# Altium PCB COMECA-PCBv1.PcbDoc
Units mm, origin at the board's own origin, x right, y up, seen from the top; angles counter-clockwise.
Board outline 156.72 x 161.29 mm, 2 copper layers (Top Layer, Bottom Layer); 89 components, 83 nets, 409 pads, 26 vias.
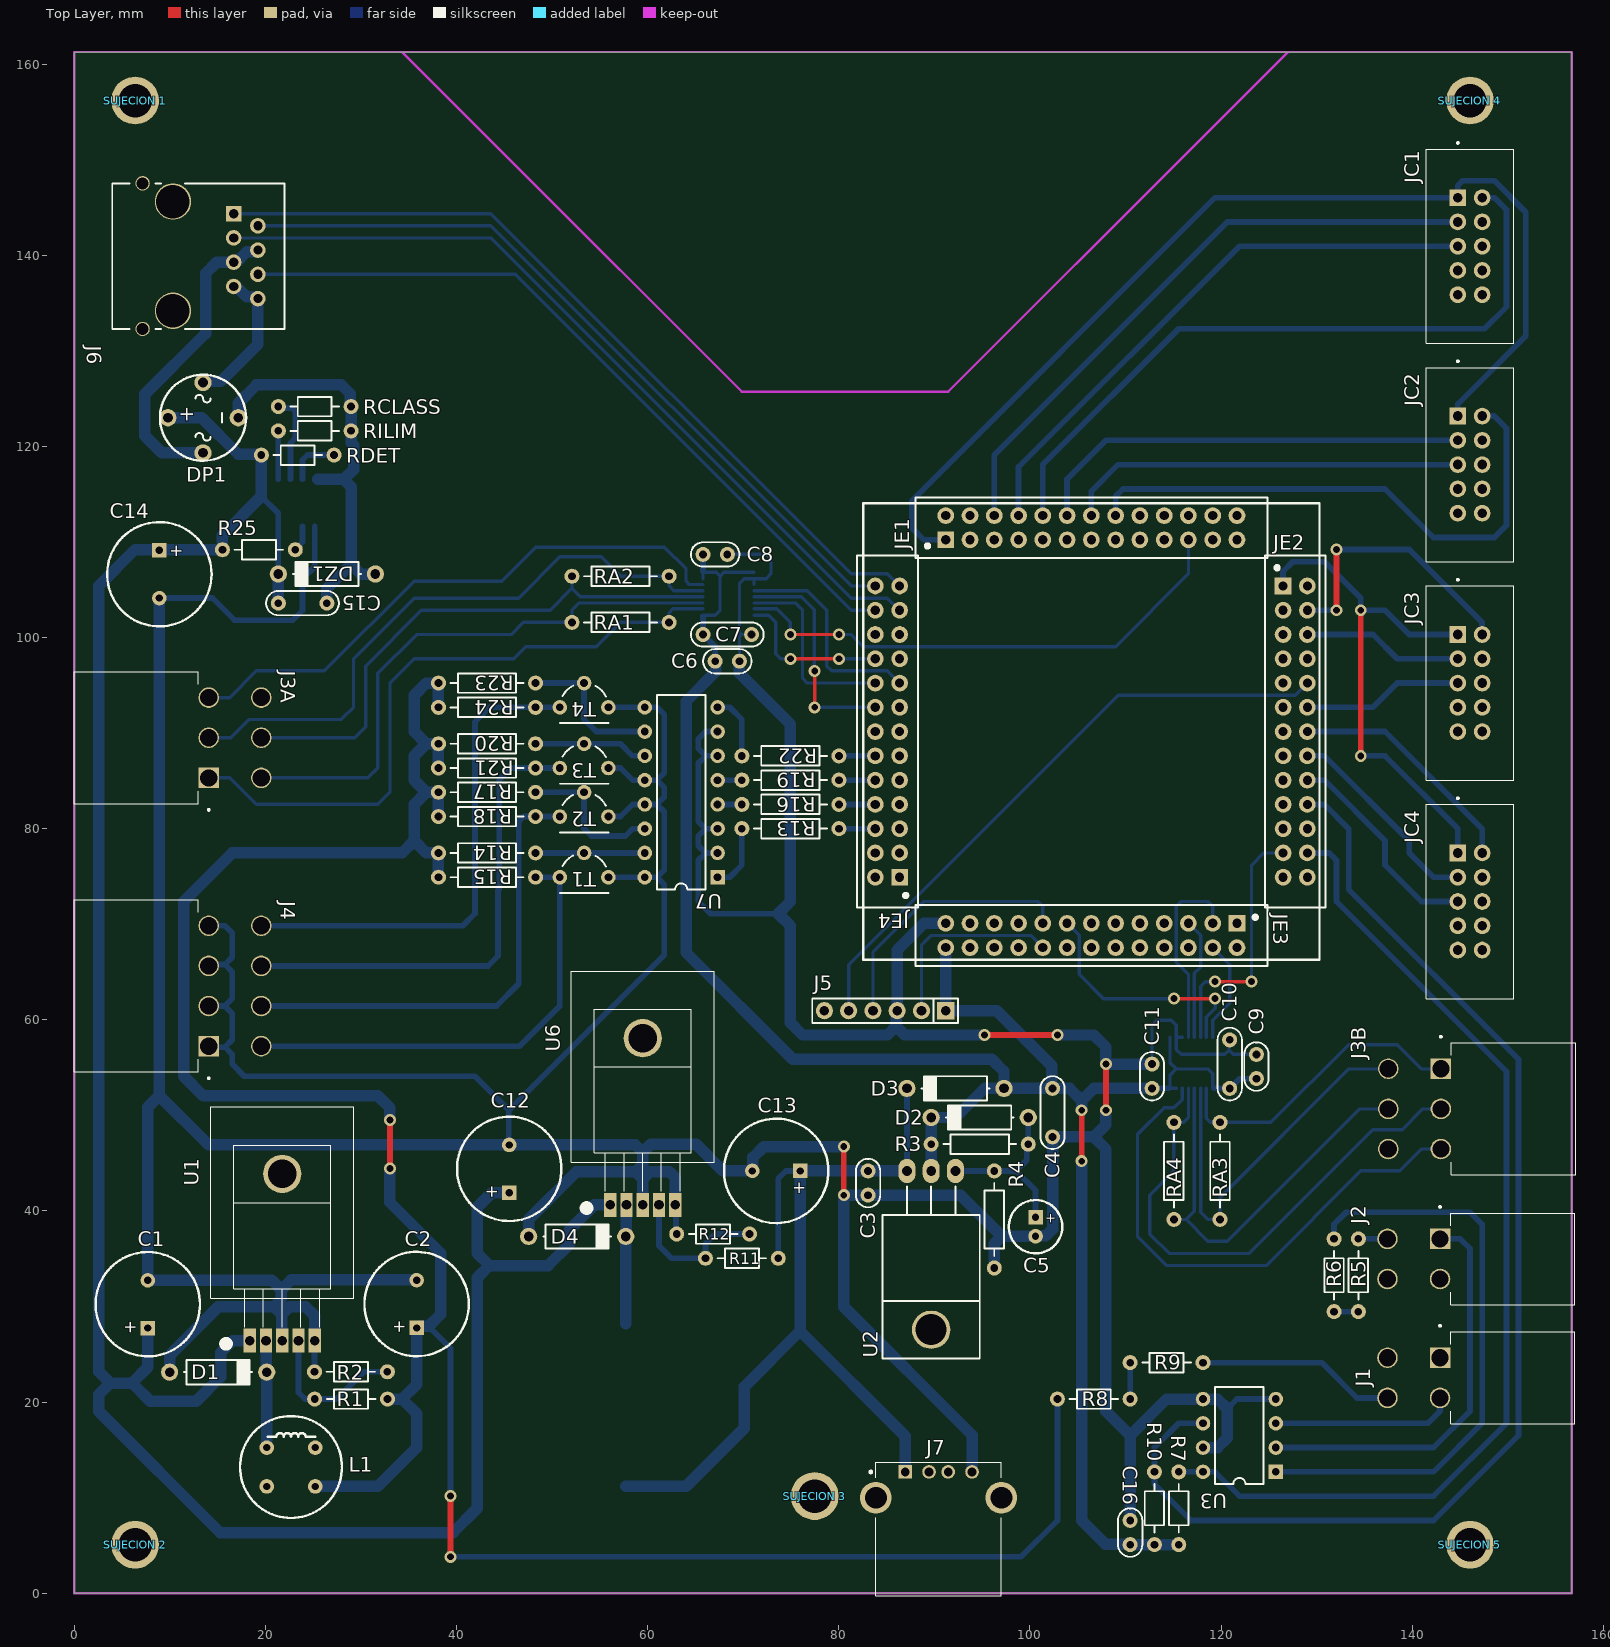
[diagram p0: Top Layer view]
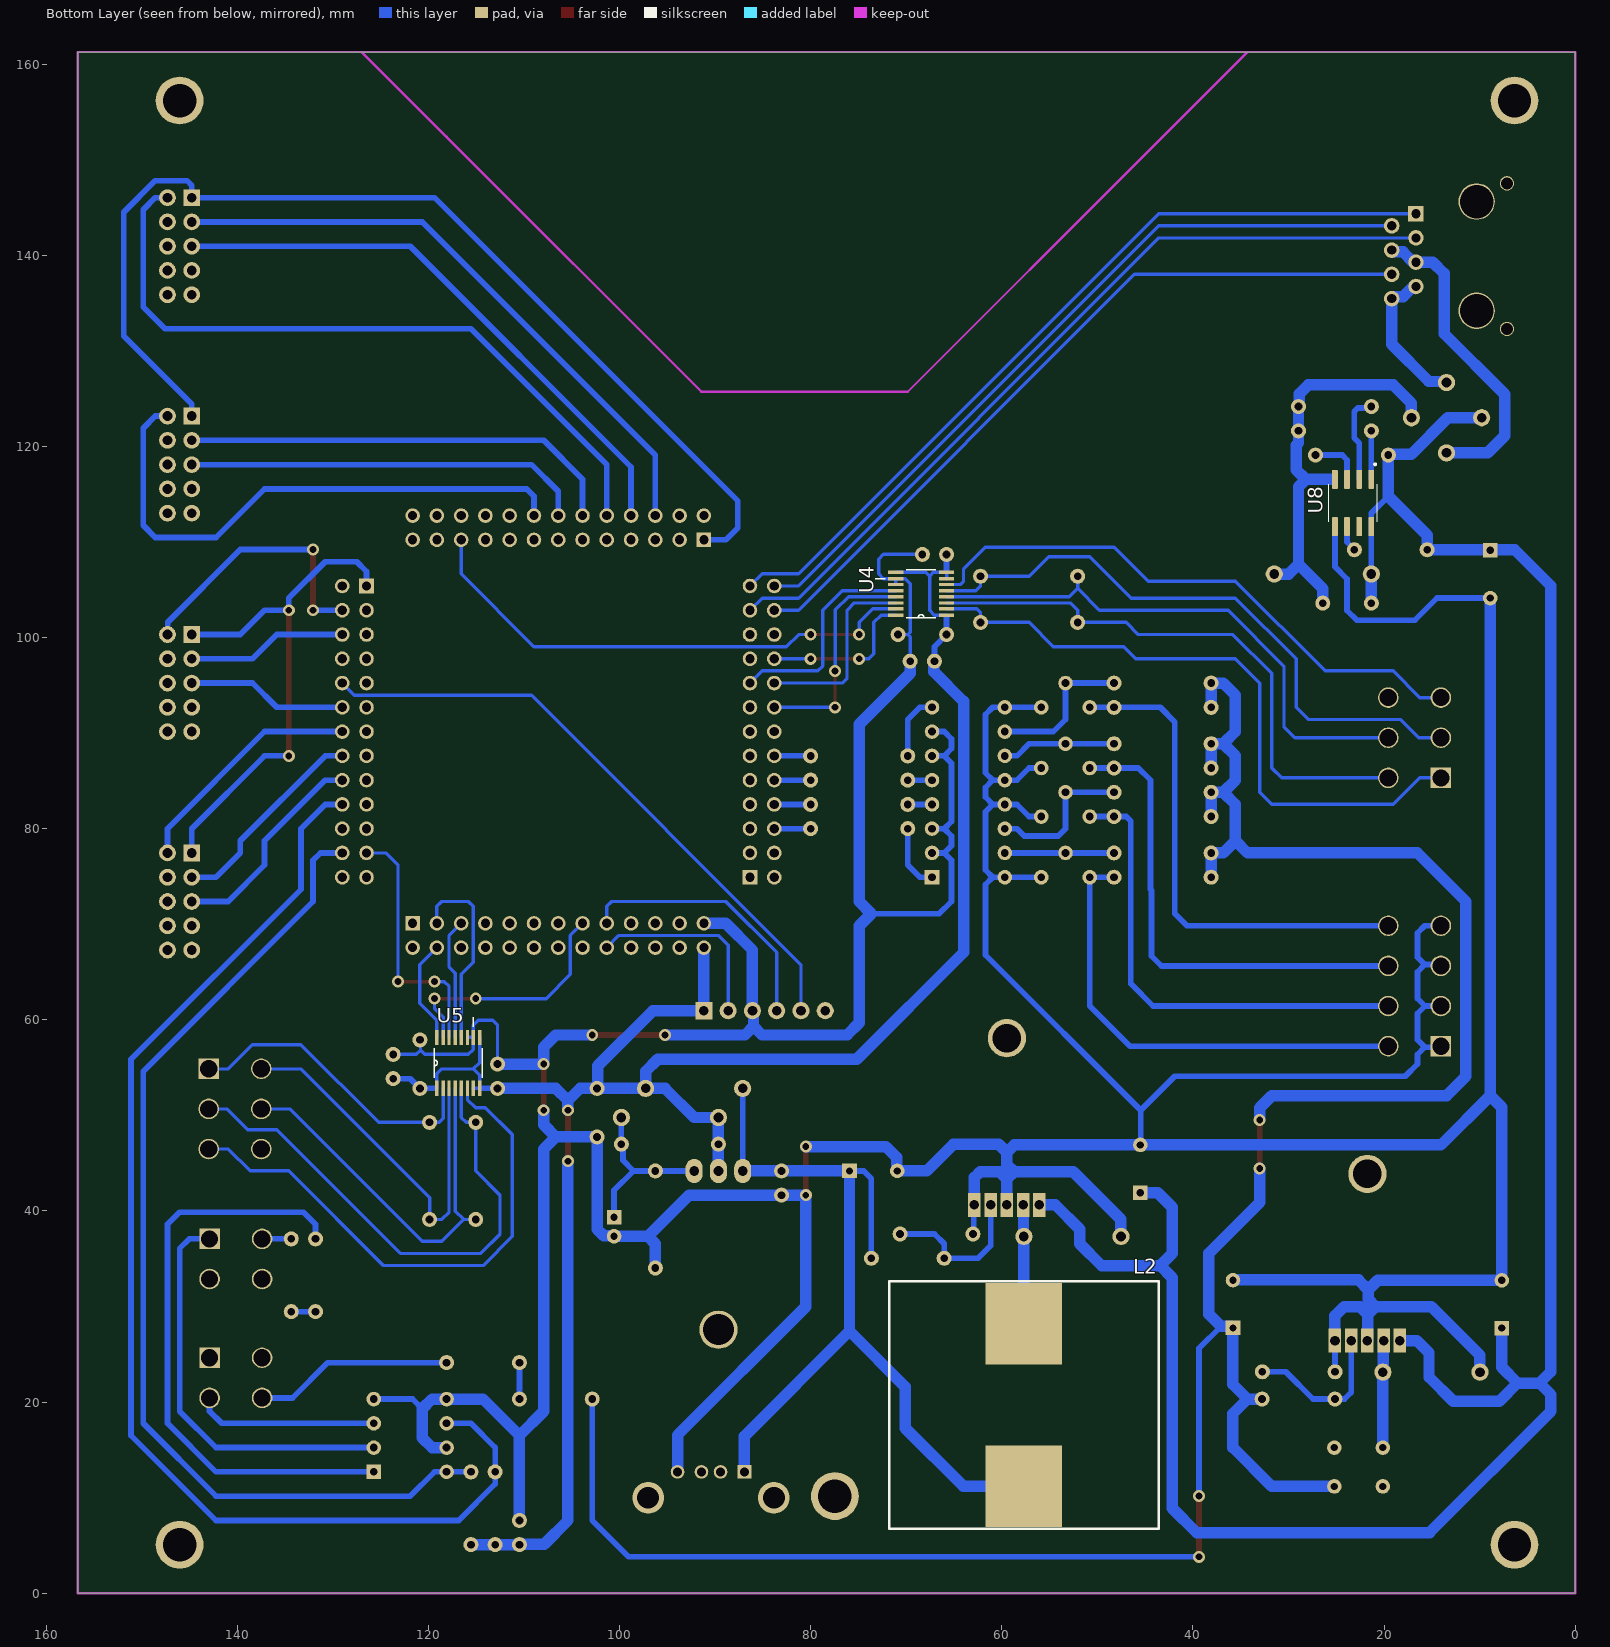
[diagram p1: Bottom Layer view, seen from below]

## Layer stack, top to bottom
Top Solder: solder mask 0.0102, Solder Resist, Dk 3.5
Top Layer: signal copper 0.0356
Dielectric 1: dielectric 0.32, FR-4, Dk 4.8
Bottom Layer: signal copper 0.0356
Bottom Solder: solder mask 0.0102, Solder Resist, Dk 3.5

## Board outline
0,0 156.718,0 156.718,161.29 0,161.29

## Design rules (kind name [scope] priority, off if disabled: settings)
Clearance [All] p1: gap=0.254 ignorepadtopadclearanceinfootprint=TRUE
ComponentClearance [All] p1: gap=0.22 collisioncheckmode=3 verticalgap=0.254 showdistances=FALSE
PolygonConnect [All] p1: connectstyle=Relief reliefconductorwidth=0.254 reliefentries=4 polygonreliefangle="90 Angle" airgapwidth=0.254
RoutingVias [All] p1: holewidth=0.711 width=1.25 viastyle="Through Hole" minholewidth=0.711 minwidth=1.25 maxholewidth=0.711 maxwidth=1.25
SolderMaskExpansion [All] p1: expansion=0.102 istentingtop=FALSE
Width [All] p1: maxlimit=1.8 minlimit=0.35 preferedwidth=0.6
29 further rules are at their usual default settings.

## Classes and differential pairs
component class COMECA_Main: "SUJECION 1" "SUJECION 2" "SUJECION 3" "SUJECION 4" "SUJECION 5"
component class U_UnidadDeControl-STM: J5 JE1 JE2 JE3 JE4
component class U_SalidasDigitales: J4 R13 R14 R15 R16 R17 R18 R19 R20 R21 R22 R23 R24 T1 T2 T3 T4 U7
component class U_Fuente24VDC: C1 C2 D1 L1 R1 R2 U1
component class U_Fuente5VDC: C12 C13 D4 J7 L2 R11 R12 U6
component class U_Fuente3.3VDC: C3 C4 C5 D2 D3 R3 R4 U2
component class U_EntradasAnalogicas: C6 C7 C8 C9 C10 C11 J3A J3B RA1 RA2 RA3 RA4 U4 U5
component class U_ControladorPOE: C14 C15 DP1 DZ1 J6 R25 RCLASS RDET RILIM U8
component class U_ComandosExt: C16 J1 J2 R5 R6 R7 R8 R9 R10 U3
component class U_Calibres: JC1 JC2 JC3 JC4

## Components (designator, comment, footprint, x,y, rotation, side; value= is the part's Value field where it differs from the comment)
C1 "100uFx100V" CAP200RP 7.679,30.245 r90 top
C2 "220uFx50V" CAP200RP 35.813,30.265 r90 top
C3 "0.1uF" CAP100 83.058,42.926 r270 top
C4 "1uF" CAP200 102.362,50.292 r270 top
C5 "10uFx25V" CAP100RP 100.584,38.354 r270 top
C6 "0.1uF" CAP100 68.326,97.536 r0 top
C7 "1uF" CAP200 68.326,100.33 r0 top
C8 "0.1uF" CAP100 67.056,108.712 r0 top
C9 "0.1uF" CAP100 123.698,55.118 r90 top
C10 "1uF" CAP200 120.904,55.372 r90 top
C11 "0.1uF" CAP100 112.776,54.102 r90 top
C12 "100uFx100V" CAP200RP 45.506,44.41 r90 top
C13 "680uFx25V" CAP200RP 73.446,44.196 r180 top
C14 "100uFx100V" CAP200RP 8.89,106.64 r270 top
C15 "0.1uFx100V" CAP200 23.876,103.613 r0 top
C16 "0.1uF" CAP100 110.49,6.35 r90 top
D1 "MUR110" DO41 15.045,23.133 r0 top
D2 "1N4007" DO41 94.742,49.784 r180 top
D3 "1N4007" DO41 92.202,52.832 r180 top
D4 "MUR410" DO41 52.618,37.338 r0 top
DP1 "W10M" "PUENTE - W10M" 9.785,123.017 r90 top
DZ1 "1N4758" DO41 26.416,106.661 r180 top
J1 "PEDAL" TE_1586863-4 142.914,24.638 r90 top
J2 "PLC" TE_1586863-4 142.914,37.084 r90 top
J3A "ANALOG IN A" TE_1586863-6 14.058,85.326 r270 top locked
J3B "ANALOG IN B" TE_1586863-6 143.002,54.882 r90 top
J4 "DIGITAL OUT" TE_1586863-8 14.058,57.25 r270 top locked
J5 "PROGRAMMER" SIP6 91.186,60.96 r180 top
J6 "RJ45" RJ45 13.171,139.927 r90 top locked
J7 "USB-TYPE-A" TE_6364372-2 90.44,9.99 r0 top
JC1 "CAL_1" "TE_5104338-1 - 90DEG" 144.78,146.05 r90 top
JC2 "CAL_2" "TE_5104338-1 - 90DEG" 144.78,123.19 r90 top
JC3 "CAL_3" "TE_5104338-1 - 90DEG" 144.78,100.33 r90 top
JC4 "CAL_4" "TE_5104338-1 - 90DEG" 144.78,77.47 r90 top
JE1 "SIP13" "SIP13*2 - HDR" 91.186,110.236 r0 top
JE2 "SIP13" "SIP13*2 - HDR" 126.492,105.41 r270 top
JE3 "SIP13" "SIP13*2 - HDR" 121.666,70.104 r180 top
JE4 "SIP13" "SIP13*2 - HDR" 86.36,74.93 r90 top
L1 "2200uH" Choke10.5 22.665,13.208 r0 top
L2 "220uH" CHOKE_PAD 57.698,19.694 r180 bottom
R1 "1K" RES300 25.146,20.32 r0 top
R2 "18K" RES300 25.127,23.173 r0 top
R3 "240" RES400 99.822,46.99 r180 top
R4 "390" RES400 96.266,34.036 r90 top
R5 "1K" RES300 134.366,37.084 r270 top
R6 "150" RES300 131.826,29.464 r90 top
R7 "680" RES300 115.57,12.7 r270 top
R8 "1K" RES300 102.87,20.32 r0 top
R9 "150" RES300 110.49,24.13 r0 top
R10 "680" RES300 113.03,12.7 r270 top
R11 "1K" RES300 66.04,35.052 r0 top
R12 "3.09K" RES300 63.032,37.592 r0 top
R13 "220" RES400 80.01,80.01 r180 top
R14 "4K7" RES400 48.26,77.47 r180 top
R15 "4K7" RES400 48.26,74.93 r180 top
R16 "220" RES400 80.01,82.55 r180 top
R17 "4K7" RES400 48.26,83.82 r180 top
R18 "4K7" RES400 48.26,81.28 r180 top
R19 "220" RES400 80.01,85.09 r180 top
R20 "4K7" RES400 48.26,88.9 r180 top
R21 "4K7" RES400 48.26,86.36 r180 top
R22 "220" RES400 80.01,87.63 r180 top
R23 "4K7" RES400 48.26,95.25 r180 top
R24 "4K7" RES400 48.26,92.71 r180 top
R25 "100K" RES300 23.114,109.201 r180 top
RA1 "150" RES400 62.23,101.6 r180 top
RA2 "150" RES400 52.07,106.426 r0 top
RA3 "150" RES400 119.888,49.276 r270 top
RA4 "150" RES400 115.062,39.116 r90 top
RCLASS "4K42" RES300 28.956,124.187 r180 top
RDET "24K9" RES300 27.178,119.107 r180 top
RILIM "160K" RES300 28.956,121.647 r180 top
"SUJECION 1" "SUJECION" "SUJECION (5.00MM - 3.50MM)" 6.35,156.21 r90 top
"SUJECION 2" "SUJECION" "SUJECION (5.00MM - 3.50MM)" 6.35,5.08 r90 top
"SUJECION 3" "SUJECION" "SUJECION (5.00MM - 3.50MM)" 77.47,10.16 r90 top
"SUJECION 4" "SUJECION" "SUJECION (5.00MM - 3.50MM)" 146.05,156.21 r90 top
"SUJECION 5" "SUJECION" "SUJECION (5.00MM - 3.50MM)" 146.05,5.08 r90 top
T1 "BC338" TO92 53.34,76.2 r180 top
T2 "BC338" TO92 53.34,82.55 r180 top
T3 "BC338" TO92 53.34,87.63 r180 top
T4 "BC338" TO92 53.34,93.98 r180 top
U1 "LM2575HV-ADJ" "TO-220_5 H" 21.747,26.435 r0 top
U2 "LM317" "TO-220 H" 89.662,36.576 r180 top
U3 "TLP521" DIP8 125.73,12.7 r180 top
U4 "ADS7841E/2K5" SOP63P600X175-16N 68.453,104.597 r0 bottom
U5 "ADS7841E/2K5" SOP63P600X175-16N 116.891,55.499 r90 bottom
U6 "LM2576HV-ADJ" "TO-220_5 H" 59.476,40.64 r0 top
U7 "CNY74-4H" DIP16 67.31,74.93 r180 top
U8 "TPS2375D" SOIC127P599X175-8N 23.241,114.097 r270 bottom

## Footprints (in the part's own frame and the unit in brackets; to place one, negate y for a bottom-side part, rotate by r counter-clockwise, add the part's x,y. Pads: shape width x height; smd on the part's side, far side on the other; paste and mask are expansions set on the pad)
CAP100 [mil]
  round 62 hole 32: 1(-50,0) 2(50,0)
  silkscreen extent -100,-50 100,50, body extent -115,-33 115,34, height 241
CAP100RP [mil] "Body diameter 5mm"
  rect 60x60 hole 30: 1(-39.37,0)
  round 60 hole 30: 2(39.37,0)
  silkscreen extent -110,-110 110,110, body extent -99,-99 99,100, height 454
CAP200 [mil]
  round 62 hole 32: 1(-100,0) 2(100,0)
  silkscreen extent -150,-50 150,50, body extent -110,-46 110,44, height 246
CAP200RP [mil] "Body Diameter 10.33mm"
  rect 60x60 hole 30: 1(-98.43,0)
  round 60 hole 30: 2(98.43,0)
  silkscreen extent -215,-215 215,215, body extent -205,-204 204,205, height 787
Choke10.5 [mil] "Choke Inductor 10.5mm"
  round 60 hole 30: 1(-100,80) 2(100,-80) NC(-100,-80) NC(100,80)
  silkscreen extent -210,-210 210,210
CHOKE_PAD [mm] "Choke Inductor SMD"
  rect 8x8.5 smd: 1(0,8.5) 2(0,-8.5)
  silkscreen extent -14.1,-12.95 14.1,12.95
DIP8 [mil]
  rect 60x60 hole 32: 1(0,0)
  round 60 hole 32: 2(0,-100) 3(0,-200) 4(0,-300) 5(300,-300) 6(300,-200) 7(300,-100) 8(300,0)
  silkscreen extent 50,-350 250,50, body extent -3,-363 303,63, height 177
DIP16 [mil]
  rect 60x60 hole 32: 1(0,0)
  round 60 hole 32: 2(0,-100) 3(0,-200) 4(0,-300) 5(0,-400) 6(0,-500) 7(0,-600) 8(0,-700) 9(300,-700) 10(300,-600) 11(300,-500) 12(300,-400) 13(300,-300) 14(300,-200) 15(300,-100) 16(300,0)
  silkscreen extent 50,-750 250,50, body extent -3,-744 307,44, height 78
DO41 [mm]
  round 1.8 hole 1.016: 1(-5.08,0) 2(5.08,0)
  silkscreen extent -3.56,-1.27 3.56,1.27, body extent -5.46,-1.19 5.46,1.37, height 2.03
"PUENTE - W10M" [mm]
  round 1.8 hole 1.016: 1(0,0) 2(-3.677,-3.677) 3(0,-7.354) 4(3.677,-3.677)
  silkscreen extent -4.5,-8.18 4.5,0.82
RES300 [mil]
  round 62 hole 32: 1(0,0) 2(300,0)
  silkscreen extent 50,-40 250,40, body extent -10,-38 310,38, height 79
RES400 [mil]
  round 62 hole 32: 1(0,0) 2(400,0)
  silkscreen extent 50,-40 350,40, body extent -12,-45 412,46, height 96
RJ45 [mil]
  rect 64x64 hole 38: 1(175,-137.5)
  round 64 hole 38: 2(125,-237.5) 3(75,-137.5) 4(25,-237.5) 5(-25,-137.5) 6(-75,-237.5) 7(-125,-137.5) 8(-175,-237.5)
  round 150 hole 138 unplated: 9(225,112.5) 10(-225,112.5)
  round 59.06 hole 50: 11(300,237.5) 12(-300,237.5)
  silkscreen extent -300,-348 300,362, body extent -348,-427 345,517, height 573
SIP6 [mm]
  rect 1.8x1.8 hole 1.016: 1(0,0)
  round 1.8 hole 1.016: 2(2.54,0) 3(5.08,0) 4(7.62,0) 5(10.16,0) 6(12.7,0)
  silkscreen extent -1.27,-1.27 13.97,1.27, body extent -1.27,-1.3 13.97,1.24, height 8.38
"SIP13*2 - HDR" [mm]
  rect 1.75x1.75 / inner rect 1.524x1.524 / far side rect 1.524x1.524 hole 0.965: 1(0,0)
  round 1.75 / inner round 1.524 / far side round 1.524 hole 0.965: 2(0,2.54) 3(2.54,0) 4(2.54,2.54) 5(5.08,0) 6(5.08,2.54) 7(7.62,0) 8(7.62,2.54) 9(10.16,0) 10(10.16,2.54) 11(12.7,0) 12(12.7,2.54) 13(15.24,0) 14(15.24,2.54) 15(17.78,0) 16(17.78,2.54) 17(20.32,0) 18(20.32,2.54) 19(22.86,0) 20(22.86,2.54) 21(25.4,0) 22(25.4,2.54) 23(27.94,0) 24(27.94,2.54) 25(30.48,0) 26(30.48,2.54)
  silkscreen extent -3.17,-1.91 33.66,4.44, body extent -1.52,-1.21 32,3.75, height 8.51
SOIC127P599X175-8N [mm]
  rrect25% 1.97x0.6 smd: 1(-2.47,1.905) 2(-2.47,0.635) 3(-2.47,-0.635) 4(-2.47,-1.905) 5(2.47,-1.905) 6(2.47,-0.635) 7(2.47,0.635) 8(2.47,1.905)
  silkscreen extent -4.14,-2.52 1.95,2.52, body extent -3,-2.45 3,2.45, height 1.75
SOP63P600X175-16N [mil]
  rect 63x14 smd: 1(-105,88) 2(-105,62) 3(-105,38) 4(-105,12) 5(-105,-12) 6(-105,-38) 7(-105,-62) 8(-105,-88) 9(105,-88) 10(105,-62) 11(105,-38) 12(105,-12) 13(105,12) 14(105,38) 15(105,62) 16(105,88)
  silkscreen extent -61,-98 188,98, body extent -118,-96 118,97, height 69
"SUJECION (5.00MM - 3.50MM)" [mm]
  round 5 hole 3.5: 1(0,0)
TE_1586863-4 [mm]
  rect 2.15x2.15 hole 1.8: 1(0,0)
  round 2.15 hole 1.8: 2(0,5.5) 3(-4.2,0) 4(-4.2,5.5)
  silkscreen extent -6.9,-14.1 3.45,0.1, body extent -6.8,-14.13 3.3,6, height 11.25
TE_1586863-6 [mm]
  rect 2.15x2.15 hole 1.8: 1(0,0)
  round 2.15 hole 1.8: 2(0,5.5) 3(-4.2,0) 4(-4.2,5.5) 5(-8.4,0) 6(-8.4,5.5)
  silkscreen extent -11.1,-14.1 3.45,0.1, body extent -11.13,-14 3.17,6.13, height 11.25
TE_1586863-8 [mm]
  rect 2.15x2.15 hole 1.8: 1(0,0)
  round 2.15 hole 1.8: 2(0,5.5) 3(-4.2,0) 4(-4.2,5.5) 5(-8.4,0) 6(-8.4,5.5) 7(-12.6,0) 8(-12.6,5.5)
  silkscreen extent -15.3,-14.1 3.45,0.1, body extent -15.32,-14 3.18,6.13, height 11.25
"TE_5104338-1 - 90DEG" [mm]
  rect 1.75x1.75 hole 1.02: 1(0,0)
  round 1.75 hole 1.02: 2(0,-2.54) 3(-2.54,0) 4(-2.54,-2.54) 5(-5.08,0) 6(-5.08,-2.54) 7(-7.62,0) 8(-7.62,-2.54) 9(-10.16,0) 10(-10.16,-2.54)
  silkscreen extent -15.24,-5.84 5.83,3.3, body extent -15.24,-12.19 5.08,0.32, height 9.27
TE_6364372-2 [mm]
  rect 1.428x1.428 hole 0.92: 1(-3.5,2.71)
  round 1.428 hole 0.92: 2(-1,2.71) 3(1,2.71) 4(3.5,2.71)
  round 3.316 hole 2.3: SH1(-6.57,0) SH2(6.57,0)
  silkscreen extent -7.2,-10.28 6.57,3.72, body extent -7.26,-10.3 7.37,3.7, height 7.69
TO92 [mil]
  round 60 hole 32: 1(0,-50) 2(100,50) 3(-100,50)
  silkscreen extent -100,-39 100,115, body extent -110,-61 110,110, height 315
"TO-220 H" [mil]
  oval 70x100 hole 40: 1(-100,-300) 2(0,-300) 3(100,-300)
  round 157.48 hole 127.95: 4(0,354.33)
  silkscreen extent -200,-235 200,472, body extent -200,-308 200,452, height 175
"TO-220_5 H" [mm]
  rect 1.3x2.5 hole 1.016: 1(-3.4,0) 2(-1.7,0) 3(0,0) 4(1.7,0) 5(3.4,0)
  round 4 hole 3: 6(0,17.45)
  Top Layer pour cut-out: -8.184,3.646 8.176,3.646 8.191,25.196 -8.184,25.196
  silkscreen extent -7.5,-0.7 7.5,24.45, body extent -5.08,-0.2 5.08,19.96, height 6.06

## Part data
C1 C2 C5 C12 C13 C14: library part CAPPOL
C3 C4 C6 C7 C8 C9 C10 C11 C15 C16: library part CAP
D1 D4: library part "DIODO SCHOTTKY"
D2 D3: library part DIODO
DP1: library part PUENTE
DZ1: library part "DIODO ZENER"
J1 J2: library part 1586863-4, "Conn Power HDR 4 POS 4.2mm Solder RA Thru-Hole 4 Terminal 1 Port Tray", Package=None, Availability=Unavailable, EU_RoHS_Compliance=Compliant, MF="TE Connectivity", MP=1586863-4, Price=None, SnapEDA_Link=https://www.snapeda.com/parts/1586863-4/TE%20Connectivity%20AMP%20Connectors/view-part/1401879/?ref=snap, TE_purchase_URL=https://www.te.com/usa-en/product-1586863-4.html?te_bu=Cor&te_type=disp&te_campaign=seda_glo_cor-seda-global-disp-prtnr-fy19-seda-model-bom-cta_sma-317_1&elqCampaignId=32493
J3A J3B: library part 1586863-6, "Conn Power HDR 6 POS 4.2mm Solder RA Thru-Hole 6 Terminal 1 Port Tray", Package=None, Availability=Unavailable, EU_RoHS_Compliance=Compliant, MF="TE Connectivity", MP=1586863-6, Price=None, SnapEDA_Link=https://www.snapeda.com/parts/1586863-6/TE%20Connectivity%20AMP%20Connectors/view-part/1436757/?ref=snap, TE_purchase_URL=https://www.te.com/usa-en/product-1586863-6.html?te_bu=Cor&te_type=disp&te_campaign=seda_glo_cor-seda-global-disp-prtnr-fy19-seda-model-bom-cta_sma-317_1&elqCampaignId=32493
J4: library part 1586863-8, "Conn Power HDR 8 POS 4.2mm Solder RA Thru-Hole 8 Terminal 1 Port Tray", Package=None, Availability=Unavailable, EU_RoHS_Compliance=Compliant, MF="TE Connectivity", MP=1586863-8, Price=None, SnapEDA_Link=https://www.snapeda.com/parts/1586863-8/TE%20Connectivity%20AMP%20Connectors/view-part/1404500/?ref=snap, TE_purchase_URL=https://www.te.com/usa-en/product-1586863-8.html?te_bu=Cor&te_type=disp&te_campaign=seda_glo_cor-seda-global-disp-prtnr-fy19-seda-model-bom-cta_sma-317_1&elqCampaignId=32493
J5: library part CON6
J7: library part 6364372-2, "Conn USB 2.0 Type A RCP 4 POS Solder RA Thru-Hole 4 Terminal 1 Port Box/Tube", Package=None, Digi-Key_Part_Number=A122647-ND, Digi-Key_Purchase_URL=https://www.digikey.com/product-detail/en/te-connectivity-amp-connectors/6364372-2/A122647-ND/2286712?utm_source=snapeda&utm_medium=aggregator&utm_campaign=symbol, EU_RoHS_Compliance=Compliant, MF="TE Connectivity", MP=6364372-2, SnapEDA_Link=https://www.snapeda.com/parts/6364372-2/TE%20Connectivity%20AMP%20Connectors/view-part/2053020/?ref=snap, TE_purchase_URL=https://www.te.com/usa-en/product-6364372-2.html?te_bu=Cor&te_type=disp&te_campaign=seda_glo_cor-seda-global-disp-prtnr-fy19-seda-model-bom-cta_sma-317_1&elqCampaignId=32493
JC1 JC2 JC3 JC4: library part 5104338-1, "HEADER; PIN; AMP-LATCH; 10 POS; 2.54 X 2.54; VERTICAL; LOW PROFILE; PCB", Package=None, Availability=Unavailable, MF="TE Connectivity", MP=5104338-1, Price=None, SnapEDA_Link=https://www.snapeda.com/parts/5104338-1/TE%20Connectivity%20AMP%20Connectors/view-part/2881080/?ref=snap, TE_purchase_URL=https://www.te.com/usa-en/product-5104338-1.html?te_bu=Cor&te_type=disp&te_campaign=seda_glo_cor-seda-global-disp-prtnr-fy19-seda-model-bom-cta_sma-317_1&elqCampaignId=32493
JE1 JE2 JE3 JE4: library part CON13*2
L1 L2: library part Choke
R1 R2 R3 R4 R5 R6 R7 R8 R9 R10 R11 R12 R13 R14 R15 R16 R17 R18 R19 R20 R21 R22 R23 R24 R25 RA1 RA2 RA3 RA4 RCLASS RDET RILIM: library part RES
T1 T2 T3 T4: library part "TRANSISTOR NPN"
U1 U6: library part LM2575, "LM2575"
U2: "IC REG ADJ 1.5A 3 TERM TO-220"
U3: library part TLP521-2, "PhotoCoupler"
U4 U5: "ANALOG-TO-DIGITAL CONVERTER", Package=None, Availability=Unavailable, MP=ADS7841E/2K5, Price=None
U8: "Class 3 PoE PD with latch protection 8-SOIC -40 to 85", Package="SOIC-8 Texas Instruments", Check_prices=https://www.snapeda.com/parts/TPS2375D/Texas%20Instruments/view-part/570877/?ref=eda, Digi-Key_Part_Number=296-26922-2-ND, MF="Texas Instruments", MP=TPS2375D, Purchase-URL=https://pricing.snapeda.com/search/part/TPS2375D/?ref=eda, SnapEDA_Link=https://www.snapeda.com/parts/TPS2375D/Texas%20Instruments/view-part/570877/?ref=snap

## Via types
v1: diameter 1.25, hole 0.711, Top Layer to Bottom Layer, 26 vias

## Nets (pads, with @x,y where several pads share a name; then routed paths per layer and width w, separated by ;. In a path a pad name is that pad's centre, name@x,y a point inside that pad or via, vN(x,y) a via of type N, cw(c..) or ccw(c..) an arc to the next point about the centre after c; other vN are vias at no path point)
3.3VDC: C4.1 C6.1 C7.1 C8.1 C9.1 C10.1 C11.1 C16.1 D2.2 D3.1 J5.1 JE3.26 R3.2 R7.2 R10.2 U2.2 U4.1 U4.7 U4.8 U4.9 U5.1 U5.7 U5.8 U5.9 | length 218.4
  Top Layer w0.6: v1(105.41,45.212) v1(105.41,50.546)
  Bottom Layer w0.35: U4.1 67.056,102.362 67.564,102.87 67.564,106.426 ; U4.7 U4.8 67.158,106.832 67.564,106.426 ; U4.9 67.97,106.832 67.564,106.426 ; U5.8@114.529,52.832 U5.8 ; U5.9 114.656,55.524 115.316,54.864 ; U5.7 U5.8 ; U5.1 119.126,54.356 118.618,54.864 115.316,54.864 ; U5.8 114.656,54.204 115.316,54.864
  Bottom Layer w0.6: U4.1@65.786,102.24 C7.1 67.056,99.06 C6.1 ; U4.8@65.786,106.96 C8.1 ; C11.1 U5.8@114.529,52.832 ; U5.1@119.248,52.832 C10.1 121.92,53.848 C9.1
  Bottom Layer w1.2: C6.1 67.128,97.464 67.128,96.448 64.008,93.329 64.008,67.056 75.184,55.88 96.012,55.88 97.282,54.61 D3.1 ; U2.2 R3.2 D2.2 92.202,49.784 95.25,52.832 D3.1 ; JE3.26 J5.1 96.52,60.96 102.29,55.19 102.29,52.904 C4.1 ; v1(105.41,45.212) 105.41,7.62 107.903,5.127 110.443,5.127 C16.1 R10.2 R7.2 ; v1(105.41,50.546) 105.41,51.562 ; C11.1 106.68,52.832 105.41,51.562 ; D3.1 C4.1 ; C4.1 104.14,52.832 105.41,51.562
24VDC: C2.1 L1.2 R1.2 R8.1 R14.2 R15.2 R17.2 R18.2 R20.2 R21.2 R23.2 R24.2 | length 261.6
  Top Layer w0.6: v1(33.02,44.45) v1(33.02,49.53) ; v1(39.37,3.81) v1(39.37,10.16)
  Bottom Layer w0.6: 37.071,27.927 39.37,25.629 v1(39.37,10.16) ; v1(39.37,3.81) 99.06,3.81 102.87,7.62 R8.1
  Bottom Layer w1.2: L1.2 31.75,11.176 35.813,15.239 35.813,18.797 34.29,20.32 ; R1.2 34.29,20.32 ; v1(33.02,44.45) 33.02,40.894 38.354,35.56 38.354,29.21 37.071,27.927 35.975,27.927 C2.1 35.813,21.843 34.29,20.32 ; v1(33.02,49.53) 33.02,50.8 31.75,52.07 13.462,52.07 11.43,54.102 11.43,72.39 16.51,77.47 34.29,77.47 35.56,78.74 ; R15.2 R14.2 36.83,77.47 35.56,78.74 ; R18.2 R17.2 36.83,83.82 ; R21.2 R20.2 36.83,88.9 ; R24.2 R23.2 36.83,95.25 35.56,93.98 35.56,90.17 36.83,88.9 ; 35.56,78.74 35.56,82.55 36.83,83.82 ; 36.83,83.82 35.56,85.09 35.56,87.63 36.83,88.9
ANALOG_GND_A: J3A.5 U4.6 | length 60.6
  Bottom Layer w0.35: J3A.5 16.256,93.726 19.05,96.52 26.162,96.52 35.56,105.918 44.704,105.918 48.26,109.474 61.722,109.474 64.008,107.188 64.008,105.918 64.364,105.562 U4.6
ANALOG_GND_B: J3B.5 U5.6 | length 56.1
  Bottom Layer w0.35: U5.6 115.926,51.664 115.062,50.8 114.046,50.8 111.252,48.006 111.252,37.338 114.3,34.29 124.714,34.29 134.62,44.196 138.684,44.196 140.97,46.482 J3B.5
BUSY_A: JE4.16 U4.13 | length 23.4
  Top Layer w0.35: v1(77.47,92.71) v1(77.47,96.52)
  Bottom Layer w0.35: U4.13 76.048,104.292 77.425,102.915 77.425,96.565 v1(77.47,96.52) ; v1(77.47,92.71) JE4.16
BUSY_B: JE3.5 U5.13 | length 12.7
  Bottom Layer w0.35: JE3.5 117.856,68.834 117.856,65.532 117.196,64.872 U5.13
CH0_RA1: J3A.1 RA1.1 U4.2 | length 68.6
  Bottom Layer w0.35: J3A.1 16.274,85.326 19.05,82.55 31.75,82.55 33.02,83.82 33.02,95.25 35.56,97.79 45.974,97.79 47.244,99.06 54.61,99.06 57.15,101.6 RA1.1 62.23,102.616 62.636,103.022 U4.2
CH0_RA3: J3B.1 RA3.1 U5.2 | length 32.3
  Bottom Layer w0.35: U5.2 118.466,49.682 118.872,49.276 RA3.1 125.222,49.276 133.35,57.404 138.43,57.404 140.97,54.864 142.984,54.864 J3B.1
CH1_RA1: J3A.2 RA1.2 U4.3 | length 60.4
  Bottom Layer w0.35: J3A.2 30.716,85.326 31.75,86.36 31.75,96.266 35.814,100.33 45.72,100.33 46.99,101.6 RA1.2 52.07,102.87 52.832,103.632 U4.3
CH1_RA3: J3B.2 RA3.2 U5.3 | length 40.8
  Bottom Layer w0.35: U5.3 117.856,39.878 118.618,39.116 RA3.2 119.888,41.402 133.35,54.864 137.484,54.864 J3B.2
CH2_RA2: J3A.4 RA2.1 U4.4 | length 58
  Bottom Layer w0.35: J3A.4 29.328,89.526 30.48,90.678 30.48,97.028 36.322,102.87 49.784,102.87 52.07,105.156 ; RA2.1 52.07,105.156 ; U4.4 52.934,104.292 52.07,105.156
CH2_RA4: J3B.4 RA4.1 U5.4 | length 43.2
  Bottom Layer w0.35: RA4.1 116.332,39.116 ; U5.4 117.196,39.98 116.332,39.116 ; J3B.4 134.502,50.682 120.65,36.83 118.618,36.83 116.332,39.116
CH3_RA2: J3A.3 RA2.2 U4.5 | length 64.6
  Bottom Layer w0.35: J3A.3 16.374,89.526 18.288,91.44 27.94,91.44 29.21,92.71 29.21,97.79 35.56,104.14 46.482,104.14 50.8,108.458 55.118,108.458 57.15,106.426 RA2.2 62.23,105.41 62.738,104.902 U4.5
CH3_RA4: J3B.3 RA4.2 U5.5 | length 55.1
  Bottom Layer w0.35: U5.5 116.586,49.784 116.078,49.276 RA4.2 115.062,44.196 112.522,41.656 112.522,37.592 114.554,35.56 122.936,35.56 135.89,48.514 138.938,48.514 141.106,50.682 J3B.3
CS_A: JE1.21 U4.15 | length 54.6
  Top Layer w0.35: v1(74.93,100.33) v1(80.01,100.33)
  Bottom Layer w0.35: U4.15 73.508,103.022 74.93,101.6 v1(74.93,100.33) ; v1(80.01,100.33) 81.28,100.33 82.55,99.06 108.966,99.06 116.586,106.68 JE1.21
CS_B: JE3.15 U5.15 | length 25.6
  Top Layer w0.35: v1(115.062,62.23) v1(119.38,62.23)
  Bottom Layer w0.35: JE3.15 105.156,68.834 105.156,64.77 107.696,62.23 v1(115.062,62.23) ; U5.15 118.466,60.3 119.38,61.214 v1(119.38,62.23)
DCLK_A: JE4.20 U4.16 | length 16.5
  Top Layer w0.35: v1(74.93,97.79) v1(80.01,97.79)
  Bottom Layer w0.35: U4.16 72.644,102.362 73.406,101.6 73.406,98.298 73.914,97.79 v1(74.93,97.79) ; v1(80.01,97.79) JE4.20
DCLK_B: JE3.4 U5.16 | length 10.9
  Bottom Layer w0.35: U5.16 119.126,59.944 120.904,61.722 120.904,65.786 JE3.4
DIG_OUT1: J4.2 R15.1 T1.2 | length 49
  Bottom Layer w0.6: J4.2 46.582,57.25 50.8,61.468 T1.2 R15.1
DIG_OUT2: J4.4 R18.1 T2.2 | length 49.4
  Bottom Layer w0.6: J4.4 44.178,61.45 46.5,63.772 46.5,80.79 46.99,81.28 R18.1 T2.2
DIG_OUT3: J4.6 R21.1 T3.2 | length 50.5
  Bottom Layer w0.6: J4.6 43.298,65.65 44.332,66.684 44.332,73.542 44.45,73.66 44.45,85.09 45.72,86.36 R21.1 T3.2
DIG_OUT4: J4.8 R24.1 T4.2 | length 52.5
  Bottom Layer w0.6: J4.8 40.64,69.85 41.91,71.12 41.91,91.186 43.434,92.71 R24.1 T4.2
DIN_A: JE4.18 U4.14 | length 20.3
  Bottom Layer w0.35: U4.14 75.438,103.632 76.2,102.87 76.2,95.758 76.708,95.25 JE4.18
DIN_B: JE2.23 U5.14 | length 26.9
  Top Layer w0.35: v1(119.38,64.008) v1(123.19,64.008)
  Bottom Layer w0.35: U5.14 117.856,63.5 118.364,64.008 v1(119.38,64.008) ; v1(123.19,64.008) 123.19,76.2 124.46,77.47 JE2.23
DOUT_A: JE4.17 U4.12 | length 22.7
  Bottom Layer w0.35: U4.12 76.708,104.902 78.74,102.87 78.74,97.028 79.248,96.52 85.09,96.52 JE4.17
DOUT_B: JE3.3 U5.12 | length 20.3
  Bottom Layer w0.35: U5.12 116.586,64.77 115.316,66.04 115.316,71.882 115.824,72.39 118.618,72.39 119.126,71.882 JE3.3
GND: C1.2 C2.2 C3.2 C4.2 C5.2 C6.2 C7.2 C8.2 C9.2 C10.2 C11.2 C12.2 C13.2 C14.2 C16.2 D1.1 D4.1 J4.1 J4.3 J4.5 J4.7 J5.3 J7.4 JE3.25 R2.1 R4.1 R12.1 T1.3 T2.3 T3.3 T4.3 U1.3 U1.5 U3.4 U3.5 U3.7 U4.10 U4.11 U5.10 U5.11 U6.3 U6.5 U7.2 U7.3 U7.6 U7.7 U7.9 U7.12 U7.13 U7.16 U8.5 | length 722.2
  Top Layer w0.6: v1(80.518,41.656) v1(80.518,46.736) ; v1(95.25,58.42) v1(102.87,58.42) ; v1(107.95,50.546) v1(107.95,55.372)
  Bottom Layer w0.35: C8.2 72.39,108.712 72.898,108.204 72.898,106.68 72.39,106.172 U4.10 ; C6.2 69.596,100.076 69.85,100.33 ; C7.2 69.85,100.33 ; U4.11 U4.10 ; C11.2 112.776,59.436 113.284,59.944 114.808,59.944 115.316,59.436 U5.10 ; U5.11 U5.10 ; C10.2 120.834,57.842 120.834,56.826 ; C9.2 121.272,56.388 120.834,56.826 ; 69.85,100.33 69.596,100.584 69.596,105.664 70.102,106.17 71.118,106.17 U4.10 ; U5.10 115.316,56.896 115.824,56.388 120.396,56.388 120.834,56.826
  Bottom Layer w0.6: C14.2 14.459,104.14 16.764,101.835 22.86,101.835 23.876,102.851 23.876,106.153 25.146,107.423 U8.5 ; J4.1 14.158,57.15 15.748,57.15 ; J4.3 15.73,61.45 ; J4.5 14.194,65.786 15.748,65.786 ; J4.7 15.748,69.85 16.51,69.088 16.51,66.548 15.748,65.786 ; R2.1 25.137,23.184 25.137,26.425 U1.5 ; C12.2 45.466,46.95 45.466,50.546 ; D4.1 D4.1@47.56,37.36 ; T1.3 U7.16 60.96,74.93 ; T2.3 57.15,81.28 58.42,82.55 U7.13 60.96,82.55 ; T3.3 57.15,86.36 58.42,85.09 U7.12 60.96,85.09 ; T4.3 U7.9 60.96,92.71 61.722,91.948 61.722,85.852 60.96,85.09 ; U6.5 62.954,40.562 62.954,37.67 R12.1 ; U7.2 66.04,77.47 ; U7.3 66.04,80.01 ; U7.6 66.04,87.63 ; U7.7 66.04,90.17 65.278,89.408 65.278,88.392 66.04,87.63 ; 73.66,71.12 66.548,71.12 65.278,72.39 65.278,76.708 66.04,77.47 ; C5.2 C5.2@100.643,37.413 ; 120.65,19.304 121.666,20.32 U3.4 ; 15.73,61.45 16.51,60.67 16.51,57.912 15.748,57.15 ; 15.73,61.45 16.51,62.23 16.51,65.024 15.748,65.786 ; 15.748,57.15 16.51,56.388 16.51,55.372 17.78,54.102 41.91,54.102 45.466,50.546 ; 45.466,50.546 61.722,66.802 61.722,74.168 60.96,74.93 ; 60.96,74.93 61.722,75.692 61.722,81.788 60.96,82.55 ; 60.96,82.55 61.722,83.312 61.722,84.328 60.96,85.09 ; 66.04,77.47 65.278,78.232 65.278,79.248 66.04,80.01 ; 66.04,80.01 65.278,80.772 65.278,86.868 66.04,87.63
  Bottom Layer w1.2: C14.2 8.89,99.06 8.89,52.07 ; D1.1 9.965,24.911 15.045,29.991 20.887,29.991 ; U1.3 21.697,26.485 21.697,29.181 ; U1.5 25.147,29.033 24.189,29.991 22.507,29.991 21.697,29.181 ; C2.2 35.793,32.785 22.665,32.785 21.649,31.769 ; D4.1@47.56,37.36 47.56,39.138 52.538,44.116 58.714,44.116 ; U6.3 59.476,43.354 ; U6.5 62.876,43.51 62.27,44.116 60.238,44.116 59.476,43.354 ; C6.2 69.596,96.266 74.93,90.932 74.93,72.39 73.66,71.12 74.93,69.85 74.93,59.69 76.2,58.42 85.09,58.42 85.991,59.321 ; v1(80.518,46.736) 72.136,46.736 71.008,45.608 71.008,44.258 C13.2 67.858,44.196 65.064,46.99 60.318,46.99 59.476,46.148 ; JE3.25 88.9,70.104 86.106,67.31 J5.3 85.991,60.845 85.991,59.321 ; J7.4 93.94,16.55 80.518,29.972 v1(80.518,41.656) C3.2 92.742,41.656 97.044,37.354 ; v1(95.25,58.42) 86.892,58.42 85.991,59.321 ; R4.1 96.266,36.576 97.044,37.354 ; C5.2 97.044,37.354 ; C5.2@100.643,37.413 101.675,37.413 102.362,38.1 C4.2 106.68,47.752 ; v1(102.87,58.42) 106.68,58.42 107.95,57.15 v1(107.95,55.372) C11.2 ; v1(107.95,50.546) 107.95,49.022 106.68,47.752 ; C16.2 110.49,16.51 ; U3.7 119.634,15.24 120.65,16.256 120.65,19.304 119.634,20.32 U3.5 114.3,20.32 110.49,16.51 ; 8.89,52.07 7.679,50.859 C1.2 20.673,32.745 21.649,31.769 ; 8.89,52.07 14.05,46.91 C12.2 58.714,46.91 59.476,46.148 ; 20.887,29.991 21.697,29.181 ; 20.887,29.991 21.649,30.753 21.649,31.769 ; 58.714,44.116 59.476,43.354 ; 58.714,44.116 59.476,44.878 59.476,46.148 ; 106.68,47.752 107.95,46.482 107.95,19.05 110.49,16.51
GND1: JC1.1 JC2.1 JE1.1 | length 111.4
  Bottom Layer w0.6: JE1.1 88.9,110.236 87.63,111.506 87.63,114.3 119.38,146.05 JC1.1 144.78,147.32 145.288,147.828 148.59,147.828 151.892,144.526 151.892,131.572 144.78,124.46 JC2.1
GND2: JC3.1 JC4.1 JE2.1 | length 55.2
  Top Layer w0.6: v1(134.62,87.63) v1(134.62,102.87)
  Bottom Layer w0.6: JE2.1 126.492,106.934 127.508,107.95 130.81,107.95 134.62,104.14 v1(134.62,102.87) 137.16,102.87 139.7,100.33 JC3.1 ; v1(134.62,87.63) 137.16,87.63 144.78,80.01 JC4.1
NetC1_1: C1.1 C12.1 C14.1 C15.1 DP1.1 DZ1.2 R25.2 RDET.2 U1.1 U6.1 U8.8 | length 261.4
  Bottom Layer w0.6: 19.558,114.789 21.336,113.011 U8.8 DZ1.2
  Bottom Layer w1.2: C1.1 7.679,23.641 6.028,21.99 ; DP1.1 13.329,123.017 17.167,119.178 19.486,119.178 RDET.2 19.558,114.789 15.494,110.725 R25.2 8.951,109.201 C14.1 8.81,109.22 6.35,109.22 2.54,105.41 2.54,99.06 2.54,23.193 3.742,21.99 ; U1.1 16.569,26.435 15.299,25.165 15.299,22.625 12.759,20.085 7.933,20.085 6.028,21.99 ; C15.1 DZ1.2 ; C12.1 43.688,41.91 42.164,40.386 42.164,35.56 43.434,34.29 ; U6.1 54.396,40.64 51.856,38.1 51.856,36.576 49.57,34.29 43.434,34.29 ; 3.742,21.99 6.028,21.99 ; 3.742,21.99 2.54,20.788 2.54,19.05 15.24,6.35 39.624,6.35 42.164,8.89 42.164,33.02 43.434,34.29
NetC3_1: C3.1 C13.1 D3.2 J7.1 L2.2 R11.2 U2.3 | length 94.3
  Bottom Layer w0.6: R11.2 73.66,43.394 74.462,44.196 C13.1 ; U2.3 D3.2
  Bottom Layer w1.2: L2.2 64.026,11.194 70.104,17.272 70.104,21.59 75.946,27.432 ; J7.1 86.94,16.438 75.946,27.432 ; U2.3 C3.1 C13.1 75.946,27.432
NetC5_1: C5.1 D2.1 R3.1 R4.2 U2.1 | length 18.1
  Bottom Layer w0.6: U2.1 R4.2 98.552,44.196 ; D2.1 R3.1 99.659,46.827 99.659,45.303 98.552,44.196 ; C5.1 100.584,42.164 98.552,44.196
NetC15_2: C15.2 DP1.3 DZ1.1 RCLASS.1 RILIM.1 U8.4 | length 44
  Bottom Layer w1.2: DP1.3 17.139,124.541 19.05,126.452 27.94,126.452 28.884,125.508 28.884,124.258 RCLASS.1 RILIM.1 28.956,120.377 29.21,120.123 29.21,117.583 28.194,116.567 ; 25.451,116.567 28.194,116.567 ; C15.2 26.416,105.137 28.956,107.677 ; DZ1.1 29.972,106.661 28.956,107.677 ; 28.194,116.567 28.956,115.805 28.956,107.677
NetD1_2: D1.2 L1.1 U1.2 | length 11.2
  Bottom Layer w0.6: U1.2 U1.2@20.086,26.396 ; D1.2@20.086,23.172 D1.2
  Bottom Layer w1.2: D1.2@20.086,23.172 U1.2@20.086,26.396 ; L1.1 D1.2
NetD4_2: D4.2 L2.1 U6.2 | length 12.5
  Bottom Layer w0.6: D4.2 D4.2@57.737,37.377 ; U6.2@57.737,40.601 U6.2
  Bottom Layer w1.2: L2.1 D4.2 ; D4.2@57.737,37.377 U6.2@57.737,40.601
NetDP1_2: DP1.2 J6.4 J6.5 | length 33
  Bottom Layer w0.6: J6.5 J6.5@16.939,139.292 ; J6.4@19.008,140.366 J6.4
  Bottom Layer w1.2: DP1.2 9.144,119.34 7.366,121.118 7.366,125.464 13.728,131.826 13.728,138.114 14.907,139.292 J6.5 ; J6.5@16.939,139.292 18.012,140.366 J6.4@19.008,140.366
NetDP1_4: DP1.4 J6.7 J6.8 | length 15.3
  Bottom Layer w0.6: J6.7 J6.7@16.939,136.752 ; J6.8@19.008,135.678 J6.8
  Bottom Layer w1.2: DP1.4@13.412,126.744 DP1.4 13.577,126.809 15.303,126.809 19.204,130.71 J6.8 ; J6.7@16.939,136.752 18.012,135.678 J6.8@19.008,135.678
NetJ1_3: J1.3 U3.3 | length 19.1
  Bottom Layer w0.6: U3.3 141.644,17.78 142.914,19.05 J1.3
NetJ1_4: J1.4 R9.2 | length 20.8
  Bottom Layer w0.6: R9.2 130.538,24.13 134.23,20.438 J1.4
NetJ2_2: J2.2 R5.1 | length 3
  Bottom Layer w0.6: R5.1 J2.2
NetR1_1: R1.1 R2.2 U1.4 | length 16.2
  Bottom Layer w0.6: U1.4 23.447,21.003 24.13,20.32 R1.1 27.432,20.32 30.285,23.173 R2.2 R2.2@32.766,23.154
NetR5_2: R5.2 R6.1 | length 2.5
  Bottom Layer w0.6: R6.1 R5.2
NetR6_2: R6.2 U3.1 | length 62.6
  Bottom Layer w0.6: U3.1 142.24,12.7 147.32,17.78 147.32,38.608 146.05,39.878 133.096,39.878 131.826,38.608 R6.2
NetR8_2: R8.2 R9.1 | length 3.8
  Bottom Layer w0.6: R8.2 R9.1
NetR11_1: R11.1 R12.2 U6.4 | length 15.8
  Bottom Layer w0.6: U6.4 61.176,36.36 62.484,35.052 63.032,35.052 R11.1@65.572,35.052 ; R11.1 66.04,36.576 67.056,37.592 R12.2
NetR13_2: R13.2 U7.1 | length 6.9
  Bottom Layer w0.6: U7.1 68.58,74.93 69.85,76.2 R13.2
NetR14_1: R14.1 T1.1 U7.15 | length 11.4
  Bottom Layer w0.6: R14.1 T1.1 U7.15
NetR16_2: R16.2 U7.4 | length 2.5
  Bottom Layer w0.6: U7.4 R16.2
NetR17_1: R17.1 T2.1 U7.14 | length 15.9
  Bottom Layer w0.6: R17.1 T2.1 53.34,80.01 54.102,79.248 57.658,79.248 58.42,80.01 U7.14
NetR19_2: R19.2 U7.5 | length 2.5
  Bottom Layer w0.6: U7.5 R19.2
NetR20_1: R20.1 T3.1 U7.11 | length 12
  Bottom Layer w0.6: R20.1 T3.1 57.15,88.9 58.42,87.63 U7.11
NetR22_2: R22.2 U7.8 | length 6.9
  Bottom Layer w0.6: U7.8 68.58,92.71 69.85,91.44 R22.2
NetR23_1: R23.1 T4.1 U7.10 | length 15.8
  Bottom Layer w0.6: R23.1 T4.1 53.34,91.44 54.61,90.17 U7.10
NetR25_1: R25.1 U8.6 | length 2.7
  Bottom Layer w0.6: R25.1 23.114,109.241 23.876,110.003 U8.6
NetRCLASS_2: RCLASS.2 U8.2 | length 9.3
  Bottom Layer w0.6: RCLASS.2 21.499,124.023 22.763,124.023 23.114,123.672 23.114,120.885 22.606,120.377 U8.2
NetRDET_1: RDET.1 U8.3 | length 5.5
  Bottom Layer w0.6: U8.3 23.876,118.599 24.384,119.107 RDET.1
NetRILIM_2: RILIM.2 U8.1 | length 5.1
  Bottom Layer w0.6: U8.1 RILIM.2
PA0: JC3.2 JE2.4 | length 29.1
  Top Layer w0.6: v1(132.08,102.87) v1(132.08,109.22)
  Bottom Layer w0.6: JE2.4 v1(132.08,102.87) ; v1(132.08,109.22) 139.7,109.22 147.3,101.62 147.3,100.35 JC3.2
PA13: J5.4 JE3.17 | length 28.1
  Bottom Layer w0.35: J5.4 83.566,67.056 88.9,72.39 100.838,72.39 101.346,71.882 JE3.17
PA14: J5.2 JE3.18 | length 20.5
  Bottom Layer w0.35: J5.2 88.646,67.818 89.662,68.834 100.076,68.834 JE3.18
PB1: JC2.2 JE1.16 | length 59.1
  Bottom Layer w0.6: JE1.16 108.966,114.808 109.728,115.57 137.16,115.57 142.24,110.49 148.59,110.49 149.86,111.76 149.86,121.92 148.59,123.19 JC2.2
PB6: JE2.24 R7.1 U3.8 | length 108.2
  Bottom Layer w0.6: R7.1 U3.8 119.38,12.7 121.92,10.16 142.24,10.16 149.86,17.78 149.86,54.61 132.08,72.39 132.08,76.708 131.318,77.47 JE2.24
PB8: JE2.20 R10.1 U3.6 | length 129.5
  Bottom Layer w0.6: U3.6 115.57,17.78 113.03,15.24 R10.1 113.03,11.43 116.84,7.62 142.24,7.62 151.13,16.51 151.13,55.88 133.35,73.66 133.35,80.01 130.81,82.55 JE2.20
PC3: JC3.3 JE2.6 | length 16.8
  Bottom Layer w0.6: JE2.6 135.89,100.33 138.43,97.79 JC3.3
PC7: JE4.8 R16.1 | length 3.8
  Bottom Layer w0.6: R16.1 JE4.8
PC9: JE4.6 R13.1 | length 3.8
  Bottom Layer w0.6: R13.1 JE4.6
PD13: JE4.12 R22.1 | length 3.8
  Bottom Layer w0.6: R22.1 JE4.12
PD15: JE4.10 R19.1 | length 3.8
  Bottom Layer w0.6: R19.1 JE4.10
PE0: JC4.5 JE2.18 | length 22.5
  Bottom Layer w0.6: JE2.18 130.81,85.09 137.16,78.74 137.16,76.2 140.97,72.39 JC4.5
PE2: JC4.3 JE2.16 | length 21.8
  Bottom Layer w0.6: JE2.16 130.81,87.63 139.7,78.74 139.7,77.47 142.24,74.93 JC4.3
PE4: JC4.2 JE2.14 | length 25
  Bottom Layer w0.6: JE2.14 137.16,90.17 147.32,80.01 JC4.2
PE6: JC3.5 JE2.12 | length 16.8
  Bottom Layer w0.6: JE2.12 135.89,92.71 138.43,95.25 JC3.5
PE7: JC2.5 JE1.14 | length 42.1
  Bottom Layer w0.6: JE1.14 106.426,115.316 109.22,118.11 JC2.5
PE9: JC2.3 JE1.12 | length 46.4
  Bottom Layer w0.6: JE1.12 103.886,116.586 107.95,120.65 JC2.3
PE11: JC1.2 JE1.10 | length 73.9
  Bottom Layer w0.6: JE1.10 101.346,118.11 115.57,132.334 147.574,132.334 149.86,134.62 149.86,144.78 148.59,146.05 JC1.2
PE13: JC1.5 JE1.8 | length 60.6
  Bottom Layer w0.6: JE1.8 98.806,117.856 121.92,140.97 JC1.5
PE15: JC1.3 JE1.6 | length 65
  Bottom Layer w0.6: JE1.6 96.266,119.126 120.65,143.51 JC1.3
PLC_GND: J2.1 U3.2 | length 42.5
  Bottom Layer w0.6: U3.2 142.24,15.24 146.05,19.05 146.05,36.068 145.034,37.084 J2.1
RST: J5.5 JE2.10 | length 65
  Bottom Layer w0.35: J5.5 81.026,65.786 109.22,93.98 127.762,93.98 JE2.10
"RX+ POE": J6.3 JE4.23 | length 85.8
  Bottom Layer w0.35: J6.3 43.588,141.832 81.28,104.14 85.09,104.14 JE4.23
"RX- POE": J6.6 JE4.24 | length 79.2
  Bottom Layer w0.35: J6.6 46.128,138.022 81.28,102.87 JE4.24
"TX+ POE": J6.1 JE4.25 | length 85.8
  Bottom Layer w0.35: J6.1 43.588,144.372 81.28,106.68 85.09,106.68 JE4.25
"TX- POE": J6.2 JE4.26 | length 80.2
  Bottom Layer w0.35: J6.2 43.588,143.102 81.28,105.41 JE4.26
pads on no net: "SUJECION 1.1" "SUJECION 2.1" "SUJECION 3.1" "SUJECION 4.1" "SUJECION 5.1" J1.1 J1.2 J2.3 J2.4 J3A.6 J3B.6 J5.6 J6.9 J6.10 J6.11 J6.12 J7.2 J7.3 J7.SH1 J7.SH2 JC1.4 JC1.6 JC1.7 JC1.8 JC1.9 JC1.10 JC2.4 JC2.6 JC2.7 JC2.8 JC2.9 JC2.10 JC3.4 JC3.6 JC3.7 JC3.8 JC3.9 JC3.10 JC4.4 JC4.6 JC4.7 JC4.8 JC4.9 JC4.10 JE1.2 JE1.3 JE1.4 JE1.5 JE1.7 JE1.9 JE1.11 JE1.13 JE1.15 JE1.17 JE1.18 JE1.19 JE1.20 JE1.22 JE1.23 JE1.24 JE1.25 JE1.26 JE2.2 JE2.3 JE2.5 JE2.7 JE2.8 JE2.9 JE2.11 JE2.13 JE2.15 JE2.17 JE2.19 JE2.21 JE2.22 JE2.25 JE2.26 JE3.1 JE3.2 JE3.6 JE3.7 JE3.8 JE3.9 JE3.10 JE3.11 JE3.12 JE3.13 JE3.14 JE3.16 JE3.19 JE3.20 JE3.21 JE3.22 JE3.23 JE3.24 JE4.1 JE4.2 JE4.3 JE4.4 JE4.5 JE4.7 JE4.9 JE4.11 JE4.13 JE4.14 JE4.15 JE4.19 JE4.21 JE4.22 L1.NC U1.6 U2.4 U6.6 U8.7

## Keep-outs
Keep-Out Layer:
  lines w0.254: 34.29,161.29 44.45,151.13 ; 127,161.29 118.11,152.4 91.44,125.73 69.85,125.73 44.45,151.13 ; 44.45,151.13 44.45,151.13 ; 0,0 156.718,0 156.718,161.29 0,161.29 0,0

## Silkscreen, mask and mechanical layers (free items; w line width, h text height)
Top Overlay:
  lines w0.254: 82.55,66.294 130.302,66.294 130.302,114.046 82.55,114.046 82.55,66.294

## Text inside footprints (layer, text, board x,y; h text height)
C1: Top Overlay "+" at 6.435,27.121 h1.27 r90
C2: Top Overlay "+" at 34.569,27.141 h1.27 r90
C5: Top Overlay "+" at 101.752,39.802 h1.02 r270
C12: Top Overlay "+" at 44.261,41.286 h1.27 r90
C13: Top Overlay "+" at 76.57,42.951 h1.27 r180
C14: Top Overlay "+" at 10.135,109.764 h1.27 r270
DP1: Top Overlay "+" at 12.462,122.517 h1.52 r90